# Altium PCB LM-003.PcbDoc (part 2 of 2)
Units mm, origin at the board's own origin, x right, y up, seen from the top; angles counter-clockwise.
Board outline 67.01 x 194 mm, 6 copper layers (Top Layer, +5V, Mid-Layer 1, +3.3V, Mid-Layer 2, Bottom Layer), stack 1.23 mm thick; 63 components, 97 nets, 377 pads, 45 vias.
Unrouted connection lines stored in the file: 85.
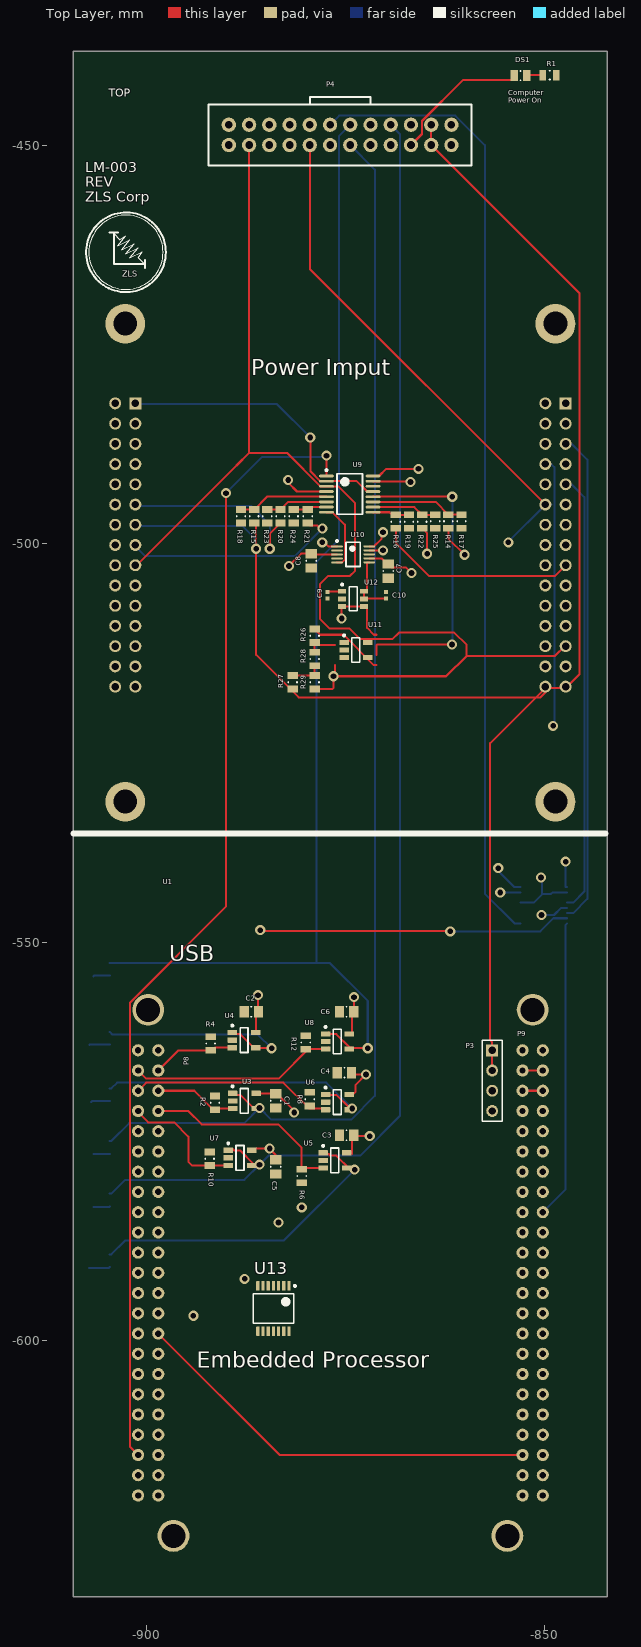
[diagram p0: Top Layer view]

## Via types
v1: diameter 1.27, hole 0.711, Top Layer to Bottom Layer, 45 vias

## Nets (pads, with @x,y where several pads share a name; then routed paths per layer and width w, separated by ;. In a path a pad name is that pad's centre, name@x,y a point inside that pad or via, vN(x,y) a via of type N, cw(c..) or ccw(c..) an arc to the next point about the centre after c; other vN are vias at no path point) (continued)
Serial1_TX: U1.9-24
Serial4_RX: U1.9-11
Serial4_TX: U1.9-13
SINE_CS0: P1.21 U2.7 | length 90.6
  Top Layer w0.254: v1(-885.698,-548.513) -885.571,-548.64 v1@-861.822,-548.64
  Mid-Layer 1 w0.254: P1.21 -898.484,-507.787 -894.207,-512.064 -894.207,-543.687 -889.254,-548.64 -885.952,-548.64 v1@-885.952,-548.132
  Bottom Layer w0.254: v1(-861.839,-548.668) -850.547,-548.668 -848.896,-547.017 U2.7
SPI0_CS0: U1.9-17 U2.8 | length 37.5
  Bottom Layer w0.254: U1.9-17 -847.35,-581.031 -847.35,-547.838 U2.8
"SPI0_CS0_MUX A2": U1.8-41 U2.15 | length 91.5
  Mid-Layer 2 w0.254: U1.8-41 -897.474,-614.391 -855.564,-572.481 v1(-855.564,-543.779)
  Bottom Layer w0.254: v1(-855.564,-543.779) -855.558,-543.773 -853.035,-543.773 U2.15
SPI0_CS0_MUX_A0: U1.8-39 U2.1 | length 98.3
  Mid-Layer 1 w0.254: U1.8-39 -895.328,-611.851 -853.786,-570.309 -853.786,-557.461 -847.365,-551.04 v1(-847.365,-539.917)
  Bottom Layer w0.254: v1(-847.365,-539.917) -847.365,-543.073 -847.321,-543.117 U2.1
SPI0_CS0_MUX_A1: U1.8-40 U2.16 | length 94.3
  Mid-Layer 1 w0.254: U1.8-40 -899.795,-610.616 -899.795,-608.711 -899.16,-608.076 -898.358,-608.076 -871.059,-580.777 -871.059,-555.972 v1(-855.818,-540.731)
  Bottom Layer w0.254: v1(-855.818,-540.731) -855.624,-540.925 -855.624,-541.273 -853.779,-543.117 U2.16
SPI0_MISO: P2.12 P4.9 U1.9-21 U10.1 | length 190.3
  Top Layer w0.254: P4.9 -879.475,-465.517 -850.111,-494.882 P2.12@-849.535,-494.882 ; v1(-877.916,-499.837) -877.641,-499.837 -877.136,-500.342 -876.061,-500.342 U10.1
  Mid-Layer 1 w0.254: v1(-877.916,-499.837) v1(-854.548,-499.837)
  Mid-Layer 2 w0.254: U1.9-21 -843.047,-581.808 -843.047,-500.525 -846.949,-496.623 -847.249,-496.623 -848.785,-495.087 P2.12@-849.165,-495.087
  Bottom Layer w0.254: v1(-854.548,-499.837) -854.548,-499.784 -849.852,-495.087 P2.12@-849.165,-495.087
SPI0_MOSI: P2.10 U1.9-18 | length 96.4
  Mid-Layer 2 w0.254: U1.9-18 -853.786,-582.895 -853.786,-578.41 -852.683,-577.308 -852.35,-577.308 -851.246,-576.204 -851.246,-575.87 -850.143,-574.767 -849.809,-574.767 -848.452,-573.41 -848.452,-541.358 -851.429,-538.381 -851.429,-494.071 P2.10 P2.10@-849.741,-492.547
SPI0_SCLK: P2.14 P4.10 U1.9-22 U10.10 | length 182.5
  Top Layer w0.254: U10.10 -871.413,-500.344 -870.49,-499.421 -870.49,-498.761 v1(-870.296,-498.567)
  Mid-Layer 1 w0.254: P4.10 -878.089,-448.807 -878.089,-470.392 -855.818,-492.663 -855.818,-496.391 ; v1(-870.296,-498.567) -868.12,-496.391 -855.818,-496.391 ; P2.14@-849.905,-497.791 -850.069,-497.627 -854.581,-497.627 -855.818,-496.391
  Mid-Layer 2 w0.254: U1.9-22 -851.246,-587.467 -849.809,-587.467 -843.809,-581.467 -843.809,-501.551 -846.197,-499.163 -847.249,-499.163 -848.785,-497.627 P2.14@-849.165,-497.627
SPI0_SYS_VOLTAGE_CS0: U2.5 U10.9 | length 61.4
  Top Layer w0.254: U10.9 v1(-870.296,-500.844)
  Mid-Layer 1 w0.254: v1(-870.296,-500.844) -866.692,-500.844 -853.059,-514.477 -853.059,-543.941 v1(-850.392,-546.608)
  Bottom Layer w0.254: v1(-850.392,-546.608) -848.82,-546.608 -847.929,-545.717 U2.5
SPI1_CS0: U1.9-28
SPI1_MISO: U1.9-29
SPI1_MOSI: U1.9-30
SPI1_SCLK: U1.9-31
Sys_Pwr_Enable: P1.14 U1.8-22 | length 93.7
  Mid-Layer 2 w0.254: P1.14@-904.435,-497.627 -904.435,-497.82 -904.628,-497.82 -905.439,-498.631 -905.439,-584.582 U1.8-22
T_MUX_A0: U1.8-31 U13.10
T_MUX_A1: U1.8-32 U13.5
T_MUX_A2: U1.8-33 U13.3
T_MUX_A3: U1.8-34 U13.12
Thermistor_CS0: P4.12 U2.9 | length 121.4
  Bottom Layer w0.254: P4.12 -875.781,-446.267 -861.217,-446.267 -857.507,-449.977 -857.507,-543.939 -853.779,-547.667 U2.9
ZH: P2.17 R16.1 | length 25.8
  Top Layer w0.254: R16.1 -868.68,-499.872 -864.489,-504.063 -848.721,-504.063 P2.17 P2.17@-847.005,-502.707
pads on no net: P1.2 P1.4 P1.6 P1.7 P1.9 P1.12 P1.16 P1.19 P1.20 P1.23 P1.25 P1.29 P1.30 P2.3 P2.6 P2.7 P2.11 P2.13 P2.15 P2.16 P2.18 P4.4 P4.5 U1. U1.8-20 U1.8-21 U1.8-23 U1.8-24 U1.8-28 U1.8-45 U1.8-46 U1.9-7 U1.9-8 U1.9-10 U1.9-12 U1.9-16 U1.9-19 U1.9-20 U1.9-23 U1.9-25 U1.9-27 U1.9-32 U1.9-33 U1.9-34 U1.9-35 U1.9-36 U1.9-37 U1.9-38 U1.9-39 U1.9-40 U1.9-41 U2.10 U2.11 U2.12
copper on no net: | length 9.7
  Top Layer w0.254: -878.867,-510.706 -878.141,-511.432 -876.326,-511.432 -875.236,-511.432 -871.426,-515.242 -871.076,-515.242

## Polygon pours and split planes (outlines as drawn)
GND on Top Layer "GND" (solid, shelved, pour order 95): -29.695,-184.767 37.31,-184.767 37.31,9.268 -29.695,9.268
GND on Bottom Layer "GND" (solid, shelved, pour order 79): -29.695,-184.767 37.31,-184.767 37.31,9.234 -29.695,9.234
+5 on +5V (split plane): -842.675,-631.677 -908.66,-631.677 -908.66,-438.697 -842.675,-438.697
+3.3 on +3.3V (split plane): -842.675,-631.677 -908.66,-631.677 -908.66,-438.697 -842.675,-438.697

## Silkscreen, mask and mechanical layers (free items; w line width, h text height)
Top Overlay:
  circle w0.254: c-902.554,-463.426 r5
  circle w0.1: c-902.554,-463.426 r4.663
  lines w0.025: -909.02,-536.187 -905.165,-536.187
  lines w0.1: -904.078,-461.064 -903.316,-461.826 -902.554,-461.318 -903.57,-462.588 -902.046,-461.826 -903.062,-463.096 -901.538,-462.334 -902.554,-463.604 -901.03,-462.842 -902.046,-464.112 -900.522,-463.35 -901.03,-464.112 -900.268,-464.874
  lines w0.254: -904.586,-460.937 -903.57,-460.937 ; -904.078,-461.064 -904.078,-464.874 -900.268,-464.874 ; -900.141,-465.382 -900.141,-464.366 ; -879.475,-444.881 -879.475,-443.946 -875.479,-443.946 -871.948,-443.946 ; -871.855,-444.881 -871.855,-443.946
  lines w0.762: -909.148,-536.387 -842.371,-536.387
  text "TOP" at -904.738,-443.887 h1
  text "Computer  / Power On" at -854.548,-444.667 h0.65
  text "LM-003" at -907.634,-453.355 h1.27
  text "REV" at -907.634,-455.171 h1.27
  text "ZLS Corp" at -907.634,-457.076 h1.27
  text "ZLS" at -902.991,-466.511 h0.75
  text "Power Imput" at -886.836,-478.887 h2
  text "USB" at -897.135,-552.387 h2
  text "Embedded Processor" at -893.635,-603.454 h2
Bottom Overlay:
  lines w0.254: -909.035,-536.197 -905.18,-536.197 ; -846.2,-536.187 -842.345,-536.187
  lines w0.762: -909.158,-536.387 -843.118,-536.387
  text "Feedback" at -868.135,-484.387 h2
  text "CTH" at -908.904,-554.447 h0.65 r270
  text "P8" at -897.135,-561.615 h0.65
  text "P9" at -849.122,-561.878 h0.65
  text "AH" at -908.904,-562.829 h0.65 r270
  text "2" at -854.675,-563.845 h0.65
  text "1" at -896.204,-563.883 h0.65
  text "1" at -846.981,-563.887 h0.65
  text "GBH" at -908.904,-569.941 h0.65 r270
  text "MH" at -908.904,-576.545 h0.65 r270
  text "BH1" at -908.904,-583.657 h0.65 r270
  text "20" at -854.294,-586.743 h0.65
  text "19" at -846.928,-586.743 h0.65
  text "19" at -895.696,-586.997 h0.65
  text "BH2" at -908.904,-591.277 h0.65 r270
  text "Motor Control / Bluetooth" at -863.16,-595.387 h2
  text "40" at -854.294,-612.08 h0.65
Mechanical 13:
  text "Stand-off for bottom: / HEX STANDOFF #4-40 SS 7/16\" / P/N: 4504-440-SS" at -910.255,-420.881 h0.65
  text "Stand-off for top:  / HEX STANDOFF #4-40 SS 3/8\" / P/N: 2055-440-SS-20" at -854.629,-421.389 h0.65
  text "BBB Position  X: 1320 mil   Y:1600 mil" at -890.362,-634.241 h0.65
  text "Stand-off for top: / HEX STANDOFF #4-40 SS 7/16\" / P/N: 2056-440-SS" at -923.128,-640.299 h0.65
  text "Stand-off for bottom: / HEX STANDOFF #4-40 SS 7/16\" / P/N: 4504-440-SS" at -923.382,-646.395 h0.65

## Dimensions
-842.165,-438.183 to -909.17,-438.187 on Mechanical 13
-909.17,-632.188 to -911.165,-438.187 on Mechanical 13
-902.635,-472.387 to -902.635,-532.387 on Mechanical 13
-848.635,-472.387 to -902.635,-472.387 on Mechanical 13
-902.635,-532.387 to -909.148,-536.387 on Mechanical 13
-909.17,-438.187 to -902.635,-532.387 on Mechanical 13
-896.585,-624.551 to -854.675,-624.551 on Mechanical 13

## Text inside footprints (layer, text, board x,y; h text height)
U1: Top Overlay "P8" at -894.68,-565.496 h0.65 r90; Top Overlay "P9" at -853.44,-561.828 h0.65